# EAGLE board devboard (EAGLE 6.4)
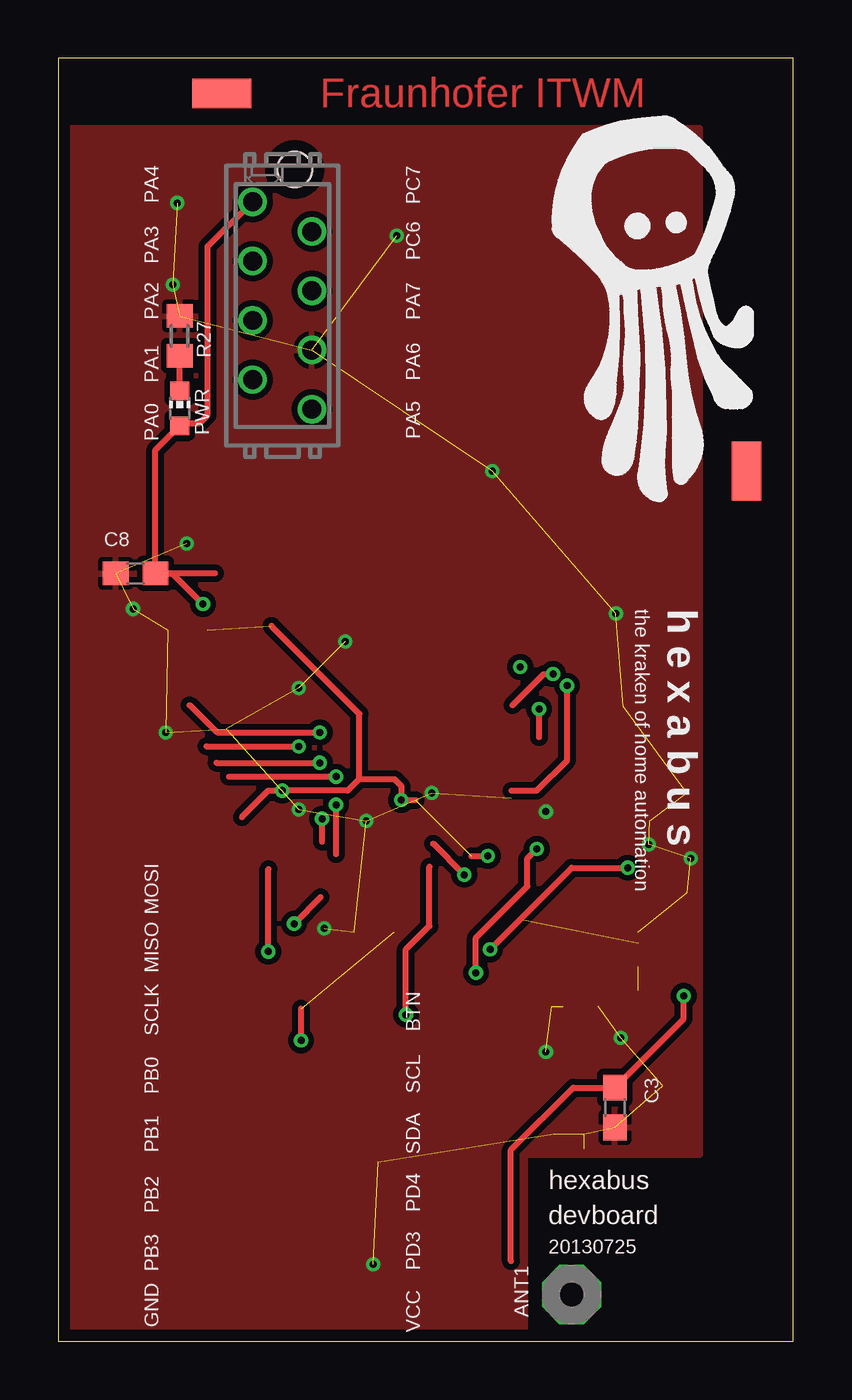
[diagram p0: board, top side]
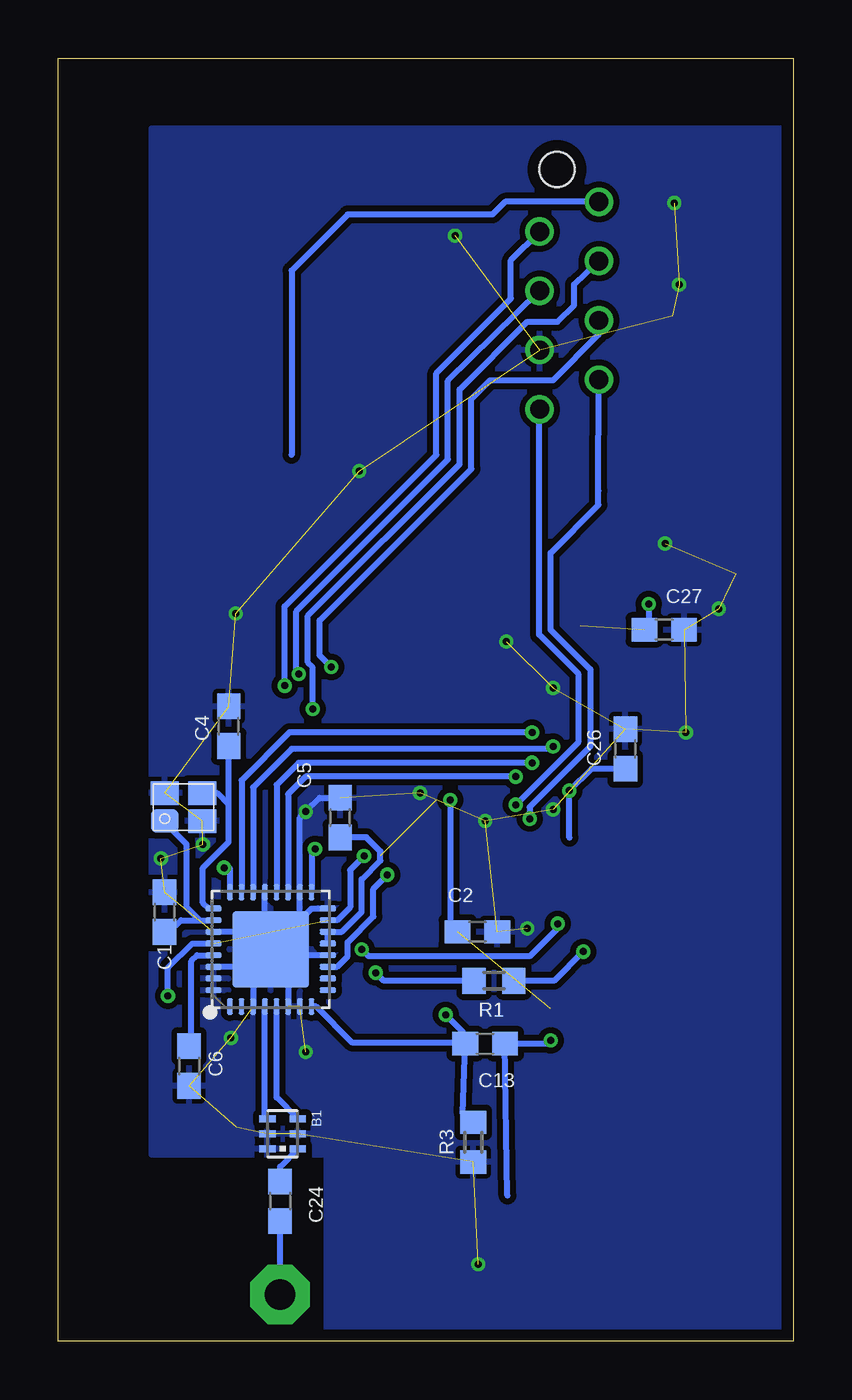
[diagram p1: board, bottom side, seen from below]

Size 31.5 x 55 mm. Coordinates in mm from the lower left corner, seen from the top.
Outline: 0,0 31.5,0 31.5,55 0,55 0,0
Copper layers (1*16): Top 0.035mm / dielectric 1.5mm / Bottom 0.035mm
Design rules "leiton": minimum track width 6mil, minimum drill 0.3mm, track to track 6mil, track to pad 6mil, pad to pad 6mil, via to via 6mil, smd to smd 6mil, copper to edge 20mil, drill to drill 8mil, minimum pad ring 8mil, minimum via ring 6mil, stop-mask expansion 3mil, vias tented up to drill 0mil, thermal gap 8mil
Holes 1.5 mm at 10.13,50.24

## Footprints (pad centres in the part's own frame; a part is rotated, then mirrored left to right if it is on the bottom)
PAD-01 = drill 1.321 pad 2.54 octagon: 1 0,0
BALUN0805 = smd 0.3 x 0.7: 1 0.65,0.65; 2 0,0.65; 3 -0.65,0.65; 4 -0.65,-0.65; 5 0,-0.65; 6 0.65,-0.65
C0603 = smd 1.1 x 1: 1 -0.85,0; 2 0.85,0
SMD1,27-2,54 = smd 1.27 x 2.54: 1 0,0
CHIP-LED0603 = smd 0.8 x 0.8: A 0,-0.75; C 0,0.75
X22 = smd 1.2 x 1: P$1 -0.8,-0.6; P$2 0.8,-0.6; P$3 0.8,0.6; P$4 -0.8,0.6
R0603 = smd 1 x 1.1: 1 -0.85,0; 2 0.85,0
32QN2 = smd 0.7 x 0.25: 1 -2.45,1.75; 2 -2.45,1.25; 3 -2.45,0.75; 4 -2.45,0.25; 5 -2.45,-0.25; 6 -2.45,-0.75; 7 -2.45,-1.25; 8 -2.45,-1.75; 17 2.45,-1.75; 18 2.45,-1.25; 19 2.45,-0.75; 20 2.45,-0.25; 21 2.45,0.25; 22 2.45,0.75; 23 2.45,1.25; 24 2.45,1.75 | smd 0.25 x 0.7: 9 -1.75,-2.45; 10 -1.25,-2.45; 11 -0.75,-2.45; 12 -0.25,-2.45; 13 0.25,-2.45; 14 0.75,-2.45; 15 1.25,-2.45; 16 1.75,-2.45; 25 1.75,2.45; 26 1.25,2.45; 27 0.75,2.45; 28 0.25,2.45; 29 -0.25,2.45; 30 -0.75,2.45; 31 -1.25,2.45; 32 -1.75,2.45 | smd 3.3 x 3.3: 33 0,0
MICROMATCH-8 = drill 0.813: 1 4.445,1.27; 2 3.175,-1.27; 3 1.905,1.27; 4 0.635,-1.27; 5 -0.635,1.27; 6 -1.905,-1.27; 7 -3.175,1.27; 8 -4.445,-1.27

## Placement (x,y rotation side)
ANT1  [PAD-01]  22,2 0 top
B1  [BALUN0805]  21.89,8.89 270 bottom
C1  18pF  [C0603]  26.94,18.4 90 bottom
C2  1uF  [C0603]  13.54,17.55 0 bottom
C3  1uF  [C0603]  23.85,10.02 270 top
C4  18pF  [C0603]  24.2,26.37 90 bottom
C5  1uF  [C0603]  19.42,22.45 90 bottom
C6  1uF  [C0603]  25.9,11.8 270 bottom
C8  1uF  [C0603]  3.31,32.92 180 top
C13  220nF  [C0603]  13.21,12.76 180 bottom
C24  100pF  [C0603]  22,6 270 bottom
C26  1uF  [C0603]  7.2,25.39 90 bottom
C27  1uF  [C0603]  5.53,30.5 0 bottom
PAD1  [SMD1,27-2,54]  7,53.5 90 top
PAD2  [SMD1,27-2,54]  29.5,37.3 0 top
PWR  red  [CHIP-LED0603]  5.2,40 0 top
Q1  CRYSTALX22  [X22]  26.14,22.9 0 bottom
R1  470R  [R0603]  12.83,15.45 180 bottom
R3  10k  [R0603]  13.72,8.53 90 bottom
R27  82R  [R0603]  5.2,43.1 270 top
U1  [32QN2]  22.4,16.8 90 bottom
U$1  HEXAKRAKE  [HEXAKRAKE]  21.2,36.1 0 top
X1  MICROMATCH-8  [MICROMATCH-8]  9.6,44.4 90 top

## Library data of the parts
ANT1 = discrete
B1 U1 = microbuilder
C1-C6 C8 C13 C24 C26 C27 R1 R3 R27 = rcl
PAD1 PAD2 = wirepad
PWR = led
Q1 = crystals-new
U$1 = artwork
X1 = con-amp-micromatch; MF: FARNELL; MPN: 7-215464-8; OC_FARNELL: 3784642; OC_NEWARK: 26H0301

## Nets
AT_RST: C13.2 R3.2 U1.8
CLKM: R1.1
GND: B1.2 B1.5 B1.6 C1.2 C2.2 C3.2 C4.2 C5.2 C6.2 C8.2 C26.2 C27.2 Q1.P$2 Q1.P$4 R3.1 R27.1 U1.3 U1.6 U1.7 U1.12 U1.16 U1.18 U1.21 U1.27 U1.30 U1.31 U1.32 U1.33 X1.6
IRQ: U1.24
MISO: U1.20
MOSI: U1.22
N$1: C6.1 U1.29
N$2: C5.1 U1.13 U1.14
N$3: U1.9
N$5: R1.2 U1.17
N$6: U1.10
N$7: U1.1
N$8: U1.2
N$28: B1.3 U1.5
N$29: B1.4 U1.4
N$30: C1.1 Q1.P$1 U1.26
N$31: C4.1 Q1.P$3 U1.25
N$32: PWR.C R27.2
N$33: B1.1 C24.1
N$34: ANT1.1 C24.2
RXD: X1.7
SCLK: U1.19
SEL1: U1.23
SLP_TR: U1.11
TCK: X1.2
TDI: X1.5
TDO: X1.4
TMS: X1.3
TXD: X1.8
VCC: C2.1 C3.1 C8.1 C13.1 C26.1 C27.1 PWR.A U1.15 U1.28 X1.1

## Tracks (layer width: path | path; a pad name or v marks a point on that pad's centre or on a via)
AT_RST  (via drill 0.3)
  Top 0.254: v14.9,14 14.9,16.8 15.9,17.8 15.9,20.34
  Bottom 0.254: R3.2 14.16,9.74 C13.2 | U1.8 20.45,14.35 18.9,12.8 14.2,12.8 C13.2 | C13.2 14.16,13.26 v14.9,14
CLKM  (via drill 0.3)
  Top 0.254: v9,16.7 9,20.24
  Bottom 0.254: v9,16.7 10.25,15.45 R1.1
GND  (via drill 0.3)  (38 unrouted)
  Bottom 0.254: U1.33 22.75,16.8 | U1.33 22.05,16.8 | U1.33 22.4,15.74 | 21.9,16.8 U1.33 | 21.9,16.8 21.34,16.8 | U1.21 22.65,17.05 U1.33 | U1.33 21.15,18.05 U1.18 21.15,22.45 v20.9,22.7 20.3,23.3 C5.2 | U1.16 20.65,18.55 U1.33 | U1.12 21.65,16.55 21.9,16.8 | 23.15,16.05 U1.3 | 23.15,16.05 U1.30 | U1.33 23.15,16.05 | U1.6 21.65,16.05 U1.33 | U1.27 23.15,17.55 U1.33
  other vias: 4.9,45.3 5.1,48.8 14.5,47.4 23.9,31.2 12.3,30 3.2,31.4 10.3,28 20.9,12.4 25.3,21.3 27.1,20.7 16,23.5 4.6,26.1 5.5,34.2 13.2,22.3 11.4,17.7 18.6,37.3 13.5,3.3 10.3,22.8 24.1,13
  pour Top (isolate 0.254): 0,0 20,0 20,8 27.5,8 27.5,52 0,52
  pour Bottom (isolate 0.254): 0,0 20,0 20,8 27.5,8 27.5,52 0,52
IRQ  (via drill 0.3)
  Top 0.254: v10.1,17.9 11.23,19.03 | v24.4,20.3 22,20.3 v18.5,16.8
  Bottom 0.254: v10.1,17.9 10.1,17.7 11.3,16.5 18.2,16.5 v18.5,16.8 | U1.24 24.15,20.25 v24.4,20.3
MISO  (via drill 0.3)
  Top 0.254: 6.77,24.8 v11.2,24.8
  Bottom 0.254: U1.20 22.15,23.85 21.2,24.8 v11.2,24.8
MOSI  (via drill 0.3)
  Top 0.254: 6.34,25.5 v10.3,25.5
  Bottom 0.254: U1.22 23.15,23.75 21.5,25.4 10.4,25.4 v10.3,25.5
N$1
  Bottom 0.254: U1.29 25.55,16.55 25.8,16.3 25.8,12.75 C6.1
N$2
  Bottom 0.254: C5.1 18.3,21.6 17.7,21 17.7,20.6 18.5,19.8 18.5,18.4 19.35,17.55 U1.14 U1.13
N$5  (via drill 0.3)
  Top 0.254: v17.9,15.8 17.9,17.3 20.1,19.5 20.1,20.7 v20.5,21.1
  Bottom 0.254: 13.6,15.53 R1.2 17.55,15.45 v17.9,15.8 | U1.17 20.65,20.95 v20.5,21.1
N$28
  Bottom 0.254: U1.5 22.15,10.45 B1.3
N$29
  Bottom 0.254: U1.4 22.65,9.65 B1.4
N$30
  Bottom 0.254: 25.45,18.05 U1.26 | 26.8,22.3 Q1.P$1 26.94,22.24 26,21.3 26,18.6 25.45,18.05 | 25.45,18.05 26.24,18.05 26.74,17.55 C1.1
N$31
  Bottom 0.254: U1.25 25.05,18.55 25.3,18.8 25.3,20.3 24.2,21.4 24.2,23 | 24.2,23 C4.1 | Q1.P$3 24.7,23.5 24.2,23
N$32
  Top 0.254: PWR.C R27.2
N$33
  Bottom 0.254: C24.1 22,7.48 B1.1
N$34
  Bottom 0.254: ANT1.1 C24.2
RXD  (via drill 0.3)
  Top 0.254: 11.3,21.41 v11.3,22.4
  Bottom 0.254: X1.7 8.35,36.45 8.35,35.85 10.4,33.8 10.4,30.5 8.7,28.8 8.7,25.5 11.3,22.9 v11.3,22.4
SCLK  (via drill 0.3)
  Top 0.254: 7.31,24.2 v11.9,24.2
  Bottom 0.254: U1.19 21.65,23.45 20.9,24.2 v11.9,24.2
SEL1  (via drill 0.3)
  Top 0.254: 5.63,27.27 6.8,26.1 v11.2,26.1
  Bottom 0.254: U1.23 23.65,24.05 21.6,26.1 v11.2,26.1
SLP_TR  (via drill 0.3)
  Top 0.254: v17.4,20 16.07,21.33
  Bottom 0.254: v17.4,20 18,19.4 18,18.2 19.1,17.1 19.1,16.5 19.55,16.05 U1.11
TCK  (via drill 0.3)
  Top 0.254: 19.43,23.6 20.5,23.6 21.8,24.9 v21.8,28.1
  Bottom 0.254: v21.8,28.1 21.8,31.5 15.3,38 15.3,41.5 12.1,44.7 12.1,46.34 X1.2
TDI  (via drill 0.3)
  Top 0.254: 19.8,28.77 v19.8,28.9
  Bottom 0.254: X1.5 8.35,43.15 10.3,41.2 13,41.2 13.8,40.4 13.8,37.4 20.3,30.9 20.3,29.4 v19.8,28.9
TDO  (via drill 0.3)
  Top 0.254: 19.47,27.27 20.8,28.6 v21.2,28.6
  Bottom 0.254: X1.4 14.8,41.17 14.8,37.8 21.3,31.3 21.3,28.7 v21.2,28.6
TMS  (via drill 0.3)
  Top 0.254: 20.6,25.9 v20.6,27.1
  Bottom 0.254: 20.5,27.2 v20.6,27.1 20.6,28.9 20.8,29.1 20.8,31.1 14.3,37.6 14.3,40.8 11.4,43.7 10.1,43.7 9.4,44.4 9.4,45.3 X1.3
TXD  (via drill 0.3)
  Top 0.254: 11.9,20.88 v11.9,23
  Bottom 0.254: X1.8 10.89,39.94 10.89,30.29 9.2,28.6 9.2,25.7 v11.9,23
VCC  (via drill 0.3)  (4 unrouted)
  Top 0.254: X1.1 6.4,46.95 6.4,39.7 6.07,39.37 5.08,39.37 PWR.A 4.16,38.21 C8.1 | 6.71,32.92 C8.1 | v6.2,31.6 4.88,32.92 C8.1 | 12.9,24.1 12.9,26.9 9.13,30.67 | 12.9,24.1 14.4,24.1 14.7,23.8 v14.7,23.2 15.3,23.2 | v10.4,12.9 10.4,14.25 | 19.4,3.43 19.4,8.2 22.07,10.87 C3.1 26.8,13.82 v26.8,14.8 | 17.7,20.8 v18.4,20.8 | 12.9,24.1 12.4,23.6 v9.6,23.6 9,23.6 7.86,22.46
  Bottom 0.254: C27.1 6.2,30.68 v6.2,31.6 | v10.4,12.9 10.54,12.76 C13.1 12.26,6.25 | U1.15 19.55,18.05 19,18.6 19,20.2 v18.4,20.8 | U1.28 25.75,17.05 26.8,16 v26.8,14.8 | X1.1 12.36,48.84 12.9,48.3 19.1,48.3 21.5,45.9 21.5,38 | C2.1 14.7,17.55 v14.7,23.2 | 9.6,21.58 v9.6,23.6 8.66,24.54 C26.1

## Text on the board
Top: Fraunhofer ITWM
tPlace: PC7 | PA4 | PC6 | PA3 | PA7 | PA2 | PA6 | PA1 | PA5 | PA0 | the kraken of home automation | h e x a b u s | MOSI | MISO | BTN | SCLK | SCL | PB0 | SDA | PB1 | PD4 | PB2 | hexabus | PD3 | devboard | 20130725 | PB3 | VCC | GND